# Altium PCB PCB1_Tejas.PcbDoc (part 2 of 2)
Units mm, origin at the board's own origin, x right, y up, seen from the top; angles counter-clockwise.
Board outline 78.61 x 97.49 mm, 2 copper layers (Top Layer, Bottom Layer); 119 components, 67 nets, 500 pads, 65 vias.
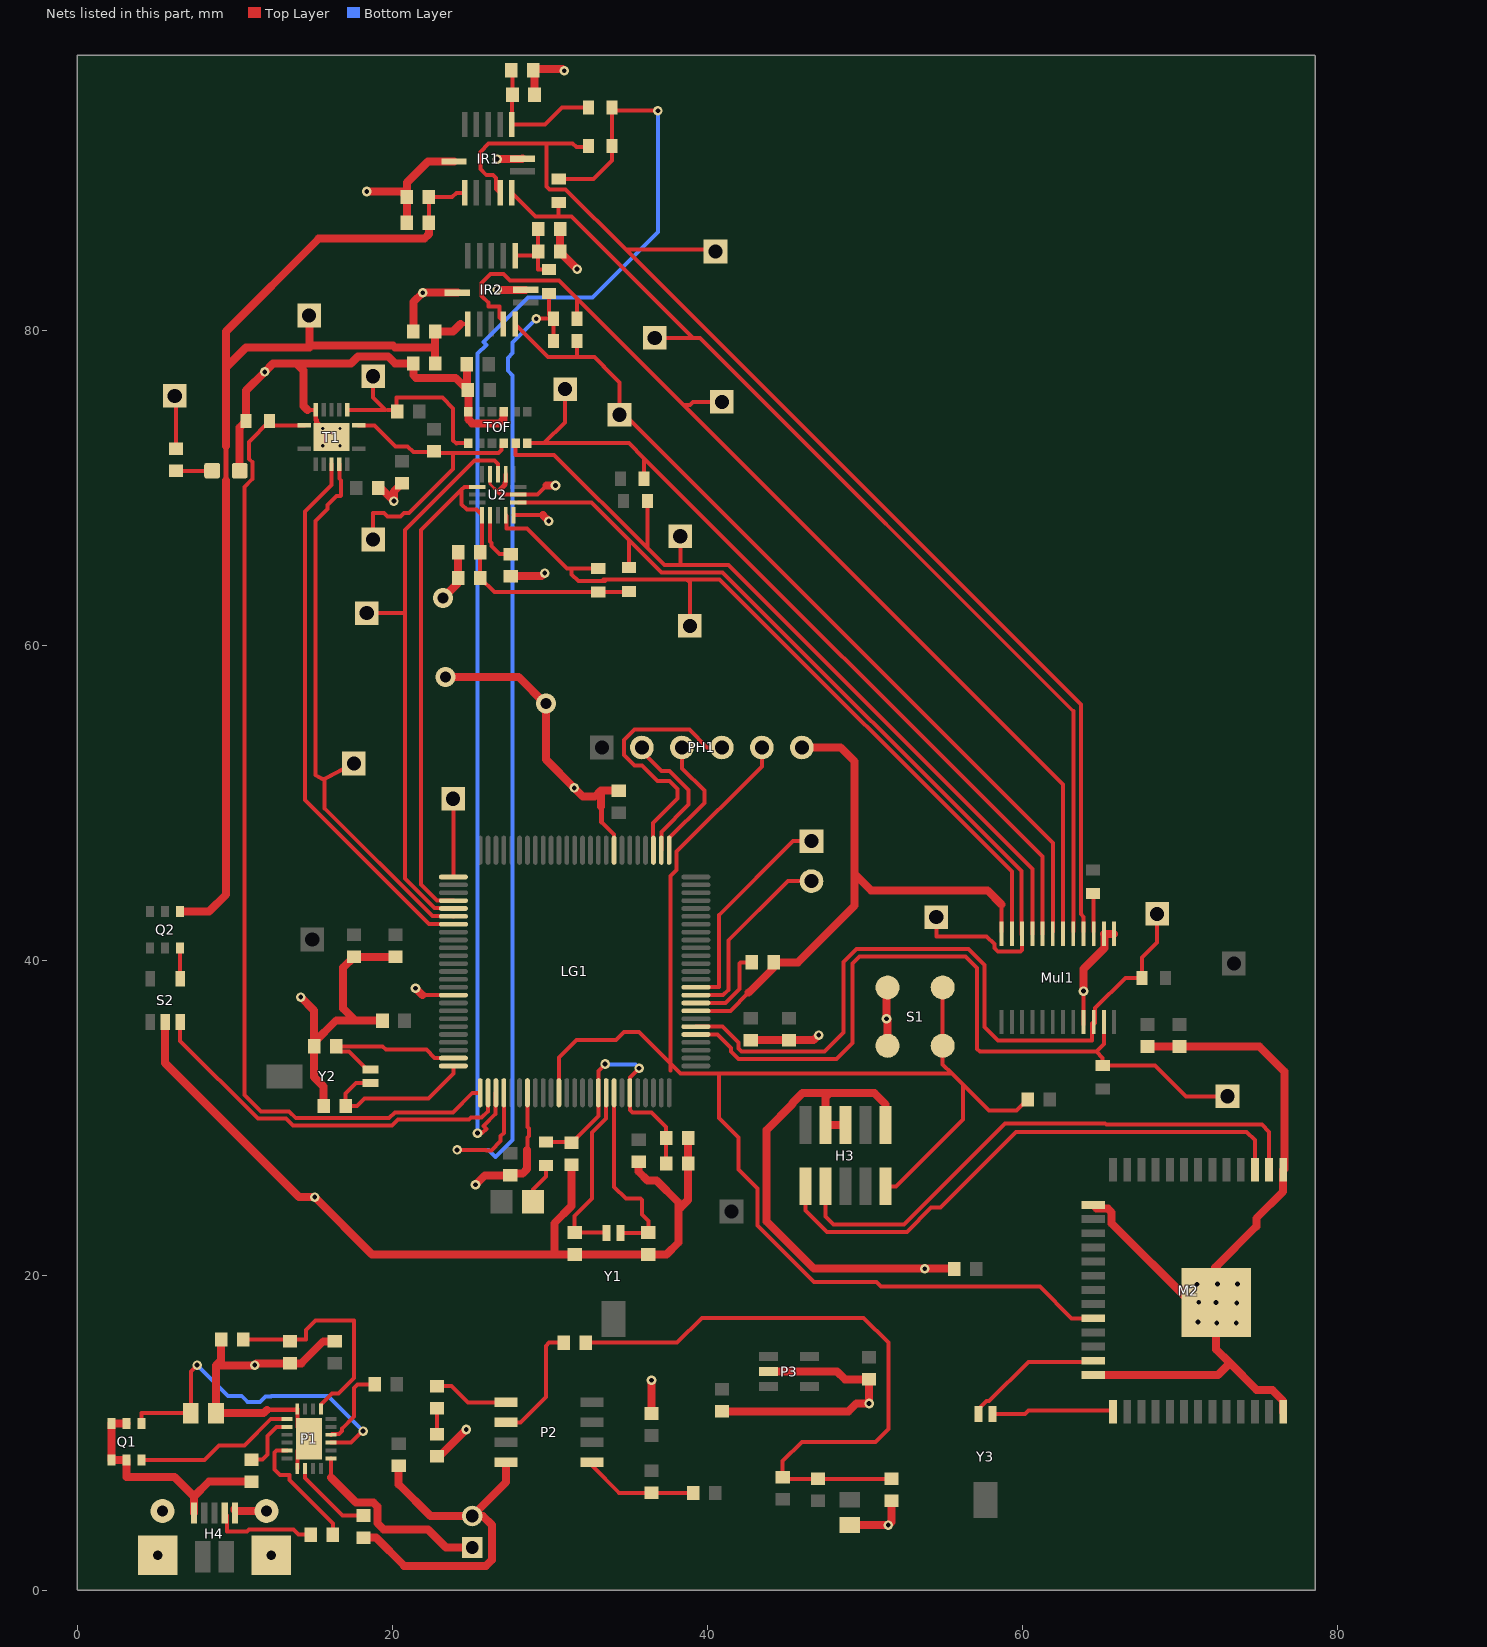
[diagram p2: the nets of this part, all layers, seen from the top]

## Via types
v1: diameter 0.61, hole 0.305, Top Layer to Bottom Layer, 56 vias
v2: diameter 1.27, hole 0.711, Top Layer to Bottom Layer, 5 vias
v3: diameter 0.5, hole 0.2, Top Layer to Bottom Layer, 4 vias

## Nets (pads, with @x,y where several pads share a name; then routed paths per layer and width w, separated by ;. In a path a pad name is that pad's centre, name@x,y a point inside that pad or via, vN(x,y) a via of type N, cw(c..) or ccw(c..) an arc to the next point about the centre after c; other vN are vias at no path point) (continued)
GND: C1.1 C2.1 C3.1 C4.1 C5.1 C6.1 C7.1 C8.1 C9.1 C10.1 C11.1 C12.1 C13.1 C14.1 C15.1 C16.1 C17.1 C18.1 C19.1 C20.1 C21.1 C22.1 C23.1 C24.1 C25.1 C26.1 C27.1 C28.1 C29.1 C30.1 C31.1 C32.2 C33.1 C34.2 C35.1 C36.1 C37.1 C39.1 C40.1 C41.1 C42.1 C43.1 C44.1 D2.2 H2.2 H3.3 H3.5 H3.9 H4.GND1 H4.GND@5.073,2.234 H4.GND@5.373,5.034 H4.GND@11.973,5.034 H4.GND@12.273,2.234 IR1.12 IR1.13 IR2.12 IR2.13 LG1.16 LG1.32 LG1.58 LG1.83 M2.1 M2.14 M2.26 M2.39 M2.40 Mul1.1 Mul1.2 Mul1.12 Mul1.21 P1.7 P1.20 P1.21 P2.4 P3.2 PH1.6 R16.1 R19.1 R20.2 R24.1 S1.1 S2.2 T1.7 T1.15 TOF.9 TOF.12 U2.5 U2.7 U2.10 U2.12 | length 401.4
  Top Layer w0.203: U2.12@26.17,70.871 26.17,70.248 26.67,69.748 26.848,69.571
  Top Layer w0.254: P1.7@13.931,7.727 13.931,8.877 P1.21@14.681,9.627 13.931,10.377 P1.20@13.931,11.527 ; 14.582,74.953 T1.7@15.104,74.953 ; 21.871,37.794 LG1.16@23.847,37.794 ; 26.848,69.571 U2.7@27.97,69.571 29.185,69.571 29.769,70.155 ; U2.5@27.67,68.271 29.519,68.271 ; 28.524,27.965 28.547,27.988 28.547,28.762 28.631,28.846 28.631,29.33 28.547,29.414 LG1.32@28.547,31.594 ; 33.249,48.793 34.047,47.995 LG1.83@34.047,46.994 ; LG1.58@39.247,36.794 41.442,36.794 42.596,37.948 ; Mul1.12@58.655,41.837 58.655,43.555 ; Mul1.21@63.855,35.937 Mul1.21@63.855,36.087 ; Mul1.21@63.855,36.087 v1(63.856,38.049)
  Top Layer w0.305: 12.006,11.461 13.865,11.461 P1.20@13.931,11.527 ; T1.7@15.104,74.953 15.104,74.321 15.159,74.321 15.159,74.173 v3(15.554,73.778) T1.15@16.027,73.304 ; 26.67,69.748 27.121,70.2 27.121,70.33 27.17,70.379 U2.10@27.17,70.871 ; 33.223,49.759 33.249,49.733 33.249,48.793
  Top Layer w0.508: S2.2@5.537,36.09 5.537,33.477 14.046,24.968 v1(15.037,24.968) 18.683,21.322 30.443,21.322 ; R20.2@9.104,15.926 9.104,14.616 8.776,14.287 ; H4.GND1@9.949,5.17 9.949,5.109 10.059,4.999 10.059,4.994 10.098,5.034 H4.GND@11.973,5.034 H4.GND@11.848,4.909 ; D2.2@10.275,71.095 10.275,73.839 R16.1@10.68,74.244 10.68,76.187 v1(11.862,77.368) 12.395,77.902 13.881,77.902 ; 12.006,11.461 11.798,11.252 C33.1@8.776,11.252 8.776,14.287 ; v1(14.148,37.668) 14.997,36.819 C30.1@14.997,34.784 ; 14.582,74.953 14.328,75.207 14.328,77.455 13.881,77.902 ; 15.354,77.888 15.367,77.902 ; C29.1@15.607,30.759 15.607,31.993 14.997,32.602 C30.1@14.997,34.544 C30.1@14.997,34.784 ; T1.15@16.027,73.304 T1.15@16.104,73.228 ; C32.2@16.307,15.813 15.584,15.813 14.184,14.413 C34.2@13.462,14.413 11.34,14.413 v1(11.227,14.3) 11.214,14.287 8.776,14.287 ; R19.1@18.136,3.35 18.926,3.35 20.72,1.556 25.909,1.556 26.289,1.936 26.289,4.14 25.711,4.718 H2.2@25.044,4.718 ; v1(18.339,88.824) 20.534,88.824 C3.1@20.89,88.468 ; C17.1@19.064,70.002 19.228,70.002 v1(20.066,69.164) 20.066,69.785 C16.1@20.574,70.293 ; C19.1@19.202,36.195 17.602,36.195 ; C18.1@20.168,40.219 C42.1@17.526,40.219 16.84,39.534 16.84,36.957 17.602,36.195 ; C35.1@20.371,7.911 20.371,6.731 22.384,4.718 H2.2@25.044,4.718 ; C4.1@20.89,86.843 C3.1@20.89,88.468 ; C8.1@21.296,79.934 21.296,81.799 v1(21.895,82.398) 24.088,82.398 IR2.12@24.091,82.4 ; v1(21.438,38.227) 21.871,37.794 ; C37.1@22.809,8.52 22.973,8.52 v1(24.663,10.211) ; v2(23.19,63.017) 24.141,63.968 C14.1@24.141,64.287 C13.1@24.141,65.913 ; v2(23.343,57.988) 27.991,57.988 29.693,56.286 v2(29.718,56.312) 29.718,52.756 v1(31.521,50.952) 32.08,50.394 32.817,50.394 33.223,50.8 ; IR1.12@23.888,90.732 22.228,90.732 20.89,89.394 C3.1@20.89,88.468 ; C11.1@24.7,77.851 C12.1@24.7,76.276 ; v1(25.248,25.756) 25.843,26.351 C20.1@27.457,26.351 ; v1(26.619,82.601) 26.645,82.575 IR2.13@28.436,82.575 ; v1(26.619,90.881) 28.208,90.881 IR1.13@28.233,90.907 ; TOF.9@27.045,74.838 27.027,74.838 27.027,74.348 26.759,74.081 25.019,74.081 25.019,74.142 24.813,74.348 24.813,74.838 TOF.12@24.795,74.838 24.795,76.181 C12.1@24.751,76.225 C12.1@24.7,76.276 ; P2.4@27.196,8.128 27.196,6.87 H2.2@25.044,4.718 ; C15.1@27.483,64.4 29.45,64.4 v1(29.642,64.592) ; C20.1@27.762,26.453 28.231,26.453 28.524,26.746 28.524,27.965 ; C6.1@28.996,94.971 28.996,96.596 30.785,96.596 v1(30.886,96.495) ; 29.519,68.271 v1(29.896,67.894) ; 29.769,70.155 v1(30.328,70.155) ; C9.1@30.621,86.436 C10.1@30.621,85.014 30.621,84.974 v1(31.699,83.896) ; C23.1@31.344,27.011 31.344,24.398 30.251,23.306 30.251,21.514 30.443,21.322 ; 33.223,49.759 33.223,50.8 ; C44.1@34.341,50.763 34.304,50.8 33.223,50.8 ; C21.1@35.611,27.215 35.611,26.583 36.17,26.025 36.739,26.025 38.125,24.638 38.125,22.073 37.375,21.322 C27.1@36.22,21.322 C28.1@31.547,21.322 30.443,21.322 ; C36.1@36.424,11.23 v1(36.424,13.335) ; 38.252,24.282 38.749,24.779 C25.1@38.749,27.102 C22.1@38.749,28.727 ; C40.1@40.894,11.365 48.932,11.365 49.428,11.862 v1(50.241,11.862) C41.1@50.241,13.397 48.706,13.397 48.209,13.894 P3.2@43.861,13.894 ; 42.596,37.948 44.185,39.537 C26.1@44.185,39.878 45.72,39.878 49.327,43.485 49.327,45.491 ; C24.1@42.723,34.936 C43.1@45.161,34.936 46.722,34.936 v1(47.041,35.255) ; PH1.6@45.974,53.518 48.438,53.518 49.327,52.629 49.327,45.491 ; H3.5@48.742,29.548 H3.3@47.472,29.548 47.472,31.317 47.727,31.572 ; C39.1@49.022,4.153 51.448,4.153 v1(51.46,4.14) 51.664,4.343 R24.1@51.664,5.675 ; H3.9@51.282,29.548 51.282,30.862 50.571,31.572 47.727,31.572 ; S1.1@51.415,34.577 51.415,36.226 v1(51.344,36.297) 51.344,37.862 51.587,38.105 S1.1@51.415,38.278 ; C31.1@55.637,20.396 55.612,20.422 v1(53.772,20.422) 46.736,20.422 43.739,23.419 43.739,29.235 45.374,30.871 45.374,30.937 46.009,31.572 47.727,31.572 ; 58.655,43.555 57.76,44.45 50.368,44.45 49.327,45.491 ; v1(63.856,38.049) 63.856,39.446 65.187,40.778 65.187,41.655 Mul1.2@65.155,41.687 Mul1.1@65.805,41.687 ; M2.26@64.472,13.673 72.398,13.673 73.152,14.427 ; M2.14@64.472,24.473 64.696,24.249 65.398,24.249 65.647,24 65.647,23.298 70.674,18.271 v1(72.278,18.271) 72.278,15.301 73.152,14.427 ; C1.1@67.92,34.53 C2.1@69.952,34.53 75.02,34.53 76.606,32.944 76.606,26.764 M2.1@76.538,26.695 76.538,25.331 74.829,23.623 74.829,23.115 72.216,20.502 M2.40@72.847,19.871 ; M2.40@72.957,18.855 M2.40@73.41,19.308 ; M2.39@76.538,11.328 76.538,12.03 75.842,12.725 74.854,12.725 73.152,14.427 ; 13.881,77.902 15.367,77.902 ; C30.1@14.997,34.784 16.408,36.195 17.602,36.195 ; 15.367,77.902 17.34,77.902 17.785,78.347 19.706,78.347 20.151,77.902 C7.1@21.296,77.902 21.296,77.179 21.481,76.995 23.982,76.995 C12.1@24.7,76.276 ; M2.40@72.847,19.871 72.847,19.761 M2.40@72.957,19.761 ; M2.40@72.847,19.871 M2.40@72.957,19.761 ; M2.40@72.957,19.761 M2.40@73.41,19.308 ; M2.40@72.957,19.761 73.863,19.761 73.635,19.533 v1(73.635,19.456) 73.558,19.456 M2.40@73.41,19.308
  other v1: 72.314,16.967 73.558,16.967 71.12,17.043 73.584,18.237 71.171,18.288 71.069,19.431 72.365,19.456
  other v3: 15.554,72.678 16.654,72.678 16.654,73.778
GPIO_EM4WUO: LG1.1 MTP4.1 | length 5
  Top Layer w0.254: LG1.1@23.847,45.294 23.847,50.085 MTP4.1@24.028,50.267
HFXTAL_N: C27.2 LG1.43 Y1.1 | length 12.1
  Top Layer w0.254: LG1.43@34.047,31.594 34.047,25.618 34.798,24.867 35.738,24.867 35.814,24.791 35.814,23.851 36.22,23.444 C27.2@36.22,22.722 36.181,22.682 Y1.1@34.442,22.682
HFXTAL_P: C28.2 LG1.42 Y1.2 | length 11.7
  Top Layer w0.254: LG1.42@33.547,31.594 33.527,31.574 33.527,29.948 32.638,29.06 32.638,24.867 31.547,23.775 C28.2@31.547,22.722 33.539,22.722 Y1.2@33.579,22.682
ID: P1.5 R34.2 | length 7.9
  Top Layer w0.254: P1.5@13.281,8.877 12.627,8.877 12.497,8.747 12.497,7.671 12.841,7.327 13.431,7.327 13.431,7.016 16.194,4.253 R34.2@16.194,3.531
IR_PWR: C3.2 C4.2 C7.2 C8.2 IR1.1 IR2.1 Q2.4 TP16.1 | length 87.6
  Top Layer w0.254: 9.398,72.669 9.398,77.648 ; 14.681,78.931 TP16.1@14.681,80.95 ; C4.2@22.29,86.843 C3.2@22.29,88.468 23.763,88.468 24.028,88.734 IR1.1@24.56,88.734 ; 22.683,78.931 22.696,78.918 C7.2@22.696,77.902 ; 24.294,80.403 IR2.1@24.764,80.403
  Top Layer w0.305: 9.398,70.458 9.398,72.669
  Top Layer w0.508: Q2.4@6.487,43.098 8.325,43.098 9.398,44.171 9.398,70.458 ; 9.398,72.669 9.398,79.934 15.291,85.827 21.996,85.827 22.29,86.12 C4.2@22.29,86.843 ; 9.398,77.648 10.668,78.918 14.681,78.918 14.681,78.931 ; TP16.1@14.681,80.95 14.695,80.936 14.695,78.931 14.822,79.058 20,79.058 20.127,78.931 22.683,78.931 ; C7.2@22.696,77.902 22.683,77.915 22.683,78.931 ; 24.294,80.403 23.825,79.934 C8.2@22.696,79.934 22.683,79.92 22.683,78.931
IR_PWR_CTRL: LG1.27 S2.3 | length 24.5
  Top Layer w0.254: S2.3@6.487,36.09 6.487,34.889 11.43,29.947 13.222,29.947 13.646,29.522 19.943,29.522 20.317,29.896 24.837,29.896 24.964,30.023 25.643,30.023 26.027,30.407 26.027,31.594 LG1.27@26.047,31.594
LFXTAL_N: C29.2 LG1.25 Y2.1 | length 10.8
  Top Layer w0.254: Y2.1@18.567,32.207 17.653,32.207 17.007,31.561 C29.2@17.007,30.759 17.729,30.759 18.211,31.241 22.275,31.241 23.847,32.813 LG1.25@23.847,33.294
LFXTAL_P: C30.2 LG1.24 Y2.2 | length 10.1
  Top Layer w0.254: C30.2@16.397,34.544 19.355,34.544 19.558,34.341 22.132,34.341 22.66,33.814 23.827,33.814 LG1.24@23.847,33.794 ; C30.2@16.727,34.214 17.221,34.214 18.364,33.071 Y2.2@18.567,33.071
LS_ENABLE: LG1.26 R16.2 T1.8 | length 62.2
  Top Layer w0.254: R16.2@12.18,74.244 10.859,72.923 10.859,71.845 11.074,71.63 11.074,70.559 10.566,70.052 10.566,31.457 11.619,30.404 13.411,30.404 13.836,29.979 19.754,29.979 20.128,30.353 23.825,30.353 25.066,31.594 LG1.26@25.547,31.594 ; R16.2@12.243,74.181 12.243,73.978 T1.8@14.379,73.978
MMA_INT1: LG1.5 TP10.1 U2.11 | length 36.9
  Top Layer w0.254: TP10.1@18.339,62.052 20.777,62.052 ; LG1.5@23.847,43.294 23.827,43.314 22.66,43.314 20.777,45.197 20.777,62.052 ; U2.11@26.67,70.871 26.67,71.524 26.444,71.75 25.192,71.75 20.777,67.335 20.777,62.052
MMA_VDD: C13.2 C14.2 LG1.4 R7.2 R8.2 U2.1 U2.14 | length 46.1
  Top Layer w0.254: LG1.4@23.847,43.794 23.827,43.814 22.811,43.814 21.793,44.831 21.793,67.319 24.363,69.889 ; U2.14@25.37,70.071 24.544,70.071 24.363,69.889 ; R7.2@35.001,63.436 34.95,63.385 R8.2@33.045,63.385 26.444,63.385 C14.2@25.541,64.287 C13.2@25.541,65.913 25.67,66.042 U2.1@25.67,68.271 25.325,68.615 24.708,68.615 24.363,68.961 24.363,69.889
NetC5_2: C5.2 C6.2 IR1.7 R12.1 | length 8.5
  Top Layer w0.254: C6.2@27.533,94.908 C6.2@27.56,94.935 ; C5.2@27.596,96.596 C6.2@27.596,94.971 C6.2@27.56,94.935 ; 32.016,94.158 30.734,94.158 29.655,93.079 IR1.7@27.56,93.079 C6.2@27.56,94.935
NetC9_2: C9.2 C10.2 IR2.7 R13.1 | length 4.5
  Top Layer w0.254: IR2.7@27.764,84.748 29.159,84.748 C10.2@29.221,84.811 ; C9.2@29.221,86.233 C10.2@29.221,85.014 C10.2@29.221,84.811 ; R13.1@29.921,83.856 29.251,83.856 29.221,83.885 C10.2@29.221,84.811
NetC15_2: C15.2 U2.2 | length 3.4
  Top Layer w0.254: U2.2@26.17,68.271 26.17,66.601 26.271,66.5 26.271,66.312 26.783,65.8 C15.2@27.483,65.8
NetC22_2: C22.2 C23.2 C25.2 LG1.41 LG1.45 R26.2 | length 17.8
  Top Layer w0.254: R26.2@29.768,28.411 R26.2@29.718,28.461 31.294,28.461 C23.2@31.344,28.411 33.047,30.115 LG1.41@33.047,31.594 33.047,32.989 v1(33.48,33.422) ; v1(35.636,33.147) 35.636,33.137 35.067,32.568 35.067,31.614 LG1.45@35.047,31.594 35.047,30.511 35.219,30.339 36.438,30.339 37.349,29.427 C22.2@37.349,28.727 C25.2@37.349,27.102
  Bottom Layer w0.254: v1(33.48,33.422) 33.527,33.376 35.408,33.376 v1(35.636,33.147)
NetC26_2: C26.2 LG1.59 | length 5.6
  Top Layer w0.254: LG1.59@39.247,37.294 41.115,37.294 42.012,38.19 42.012,39.802 42.088,39.878 C26.2@42.785,39.878
NetC33_2: C33.2 P1.13 Q1.4 | length 21.9
  Top Layer w0.254: Q1.4@4.049,10.586 4.049,11.252 C33.2@7.176,11.252 7.176,13.907 v1(7.569,14.3) ; P1.13@16.081,9.377 17.339,9.377 18.071,10.109 v1(18.11,10.109)
  Bottom Layer w0.254: v1(7.569,14.3) 9.525,12.344 10.406,12.344 10.787,11.963 11.565,11.963 11.921,12.319 12.256,12.319 12.282,12.344 15.875,12.344 v1(18.11,10.109)
NetC34_1: C34.1 P1.17 R20.1 | length 14.6
  Top Layer w0.254: R20.1@10.504,15.926 14.478,15.926 14.478,16.535 15.088,17.145 17.526,17.145 17.526,13.487 16.548,12.51 16.142,12.51 15.431,11.799 P1.17@15.431,11.527
NetC37_2: C37.2 R21.1 | length 1.6
  Top Layer w0.254: C37.2@22.809,9.92 R21.1@22.809,11.568
NetC38_1: C38.1 R22.1 R23.1 R24.2 | length 41.3
  Top Layer w0.254: R22.1@32.247,15.723 38.049,15.723 39.624,17.297 49.886,17.297 51.46,15.723 51.46,10.236 50.648,9.423 45.974,9.423 44.755,8.204 R23.1@44.755,7.188 ; R23.1@44.958,7.075 C38.1@46.99,7.075 R24.2@51.664,7.075
NetD1_1: D1.1 L2.2 P2.5 | length 7.4
  Top Layer w0.254: P2.5@32.646,8.128 32.646,7.918 34.369,6.195 L2.2@36.424,6.195 39.043,6.195 D1.1@39.065,6.172
NetD2_1: D2.1 R25.2 | length 2.3
  Top Layer w0.254: R25.2@6.223,71.08 8.507,71.08 D2.1@8.521,71.095
NetH4_ID: H4.ID R34.1 | length 6.7
  Top Layer w0.254: H4.ID@9.323,4.909 9.475,4.757 9.475,3.734 10.734,3.734 10.865,3.865 13.681,3.865 14.015,3.531 R34.1@14.794,3.531
NetJ1_1: J1.1 R25.1 | length 3.4
  Top Layer w0.254: J1.1@6.147,75.844 6.223,75.768 R25.1@6.223,72.48
NetL1_1: L1.1 P1.14 | length 5.3
  Top Layer w0.254: P1.14@16.081,9.877 16.126,9.921 16.568,9.921 16.761,10.115 16.761,10.259 17.526,11.024 17.526,12.841 17.766,13.081 L1.1@18.858,13.081
NetL3_1: L3.1 R26.1 | length 2.6
  Top Layer w0.254: L3.1@28.889,24.663 28.889,25.46 29.718,26.289 R26.1@29.718,26.961
NetM2_25: M2.25 Y3.2 | length 8
  Top Layer w0.254: Y3.2@57.201,11.201 57.201,11.522 57.687,12.008 57.854,12.008 60.35,14.504 63.677,14.504
NetM2_27: M2.27 Y3.1 | length 7.8
  Top Layer w0.254: Y3.1@58.064,11.201 60.148,11.201 60.35,11.404 65.662,11.404 M2.27@65.738,11.328
NetMul1_3: Mul1.3 R11.2 | length 2.5
  Top Layer w0.254: Mul1.3@64.505,41.837 64.505,44.07 R11.2@64.668,44.233
NetP1_1: P1.1 Q1.3 | length 10.3
  Top Layer w0.254: Q1.3@4.049,8.261 8.032,8.261 8.966,9.195 10.566,9.195 12.248,10.877 P1.1@13.281,10.877
NetP1_2: P1.2 R18.2 | length 3.8
  Top Layer w0.254: R18.2@11.024,8.295 11.724,8.295 12.04,8.611 12.04,9.804 12.612,10.377 P1.2@13.281,10.377
NetP1_8: P1.8 R19.2 | length 5.3
  Top Layer w0.254: P1.8@14.431,7.727 14.431,7.122 16.804,4.75 R19.2@18.136,4.75
NetP2_1: P2.1 R21.2 | length 4.8
  Top Layer w0.254: R21.2@22.809,12.968 23.735,12.968 24.765,11.938 P2.1@27.196,11.938
NetP2_2: P2.2 R22.2 | length 7.6
  Top Layer w0.254: P2.2@27.196,10.668 28.118,10.668 29.718,12.268 29.718,15.519 29.921,15.723 R22.2@30.847,15.723
NetQ2_3: Q2.3 S2.4 | length 1.9
  Top Layer w0.254: S2.4@6.487,38.84 Q2.3@6.487,40.773
RESET_radio: H3.10 LG1.36 M2.22 PH1.5 R17.1 S1.2 | length 106.9
  Top Layer w0.254: LG1.36@30.547,31.594 30.547,33.823 31.674,34.95 34.184,34.95 34.692,35.458 35.628,35.458 37.643,33.444 ; 37.643,33.011 37.643,33.444 ; PH1.5@43.434,53.518 43.434,52.324 38.027,46.917 38.027,45.739 37.643,45.354 37.643,33.444 ; H3.10@51.283,25.654 51.943,25.654 56.197,29.909 56.197,32.118 ; S1.2@54.915,38.278 S1.2@54.915,34.577 54.915,33.401 55.502,32.814 ; R17.1@60.311,31.166 59.6,30.455 57.861,30.455 56.197,32.118 ; M2.22@64.472,17.273 63.092,17.273 61.087,19.279 51.003,19.279 50.698,19.583 46.748,19.583 43.155,23.177 43.155,25.527 41.961,26.721 41.961,28.757 40.716,30.001 40.716,32.814 ; 37.643,33.444 38.273,32.814 40.716,32.814 ; 40.716,32.814 55.502,32.814 ; 55.502,32.814 56.197,32.118
SCL: LG1.56 MTP3.1 Mul1.22 R9.2 | length 46.5
  Top Layer w0.254: LG1.56@39.247,35.794 40.94,35.794 41.943,34.791 41.943,34.399 42.136,34.206 47.414,34.206 48.616,35.408 48.616,39.903 49.428,40.716 56.54,40.716 57.556,39.7 57.556,35.776 58.425,34.907 64.41,34.907 64.41,35.988 Mul1.22@64.465,36.043 ; Mul1.22@64.505,35.937 64.6,36.032 64.6,36.968 66.52,38.887 R9.2@67.576,38.887 67.576,40.169 68.529,41.123 MTP3.1@68.529,42.951
SCL0: IR1.5 Mul1.5 R2.1 TP2.1 | length 66.6
  Top Layer w0.254: IR1.5@27.56,88.734 29.045,87.249 30.531,87.249 ; R2.1@30.531,88.125 30.531,87.249 ; TP2.1@36.627,79.527 39.065,79.527 ; Mul1.5@63.205,41.837 63.205,55.819 39.497,79.527 39.065,79.527 ; 30.531,87.249 31.344,87.249 39.065,79.527
SCL1: IR2.5 Mul1.7 R4.1 TP4.1 | length 55.7
  Top Layer w0.254: IR2.5@27.764,80.403 29.858,78.308 31.75,78.308 ; R4.1@31.687,79.324 31.687,78.371 31.75,78.308 ; Mul1.7@61.905,41.837 61.905,47.442 34.696,74.651 TP4.1@34.392,74.651 34.392,76.683 33.376,77.699 33.401,77.699 32.791,78.308 31.75,78.308
SCL2: Mul1.9 R6.1 TOF.5 TP6.1 | length 53.2
  Top Layer w0.254: TOF.5@27.795,72.838 27.795,72.103 30.233,72.103 36.158,66.179 ; R6.1@36.158,68.961 36.158,66.179 ; TP6.1@38.252,66.929 38.252,65.1 ; Mul1.9@60.605,41.687 60.605,45.796 41.3,65.1 38.252,65.1 ; 36.158,66.179 37.236,65.1 38.252,65.1
SCL3: Mul1.11 R8.1 TP8.1 U2.4 | length 51.1
  Top Layer w0.254: U2.4@27.17,68.271 27.215,68.226 27.215,67.415 28.52,67.415 31.051,64.885 31.267,64.885 ; R8.1@33.045,64.885 31.267,64.885 ; TP8.1@38.862,61.239 38.862,63.983 38.659,64.186 ; Mul1.11@59.305,41.837 59.305,45.636 40.755,64.186 38.659,64.186 ; 31.267,64.885 31.356,64.796 31.356,64.503 31.775,64.084 33.477,64.084 33.376,64.186 38.659,64.186
SCL_OUT: H5.1 LG1.61 | length 13.9
  Top Layer w0.254: LG1.61@39.247,38.294 40.707,38.294 40.707,42.866 45.415,47.574 H5.1@46.584,47.574
SDA: LG1.55 MTP2.1 Mul1.23 R10.2 | length 49.2
  Top Layer w0.254: LG1.55@39.247,35.294 40.627,35.294 41.485,34.435 41.485,34.21 41.947,33.749 48.176,33.749 49.173,34.746 49.173,39.814 49.618,40.259 56.351,40.259 57.099,39.511 57.099,34.384 57.27,34.214 64.668,34.214 ; Mul1.23@65.155,36.087 65.155,34.7 64.668,34.214 ; MTP2.1@73,31.369 70.358,31.369 68.389,33.338 R10.2@65.075,33.338 65.075,33.807 64.668,34.214
SDA0: IR1.4 Mul1.4 R1.1 TP1.1 | length 81.1
  Top Layer w0.254: IR1.4@26.81,88.734 26.566,88.979 26.566,89.673 26.372,89.867 25.932,89.867 25.552,90.246 25.552,91.338 26.086,91.872 29.743,91.872 ; R1.1@32.422,91.719 32.346,91.643 31.648,91.643 31.42,91.872 29.743,91.872 ; TP1.1@40.488,85.014 40.377,85.124 34.798,85.124 ; Mul1.4@63.855,41.837 63.855,42.764 63.685,42.934 63.685,56.237 34.798,85.124 ; 29.743,91.872 29.751,91.865 29.751,89.138 29.944,88.944 30.978,88.944 34.798,85.124
SDA1: IR2.4 Mul1.6 R3.1 TP3.1 | length 67.3
  Top Layer w0.254: IR2.4@27.014,80.403 27.014,80.581 26.769,80.826 26.769,81.536 26.059,81.536 26.059,81.76 25.629,82.19 25.629,83.011 26.209,83.591 27.03,83.591 27.446,83.175 30.54,83.175 31.687,82.029 ; R3.1@31.687,80.747 31.687,82.029 ; TP3.1@40.894,75.463 39.065,75.463 38.862,75.26 38.456,75.26 ; Mul1.6@62.555,41.837 62.555,51.161 38.456,75.26 ; 31.687,82.029 38.456,75.26
SDA2: Mul1.8 R5.1 TOF.6 TP5.1 | length 54
  Top Layer w0.254: TOF.6@28.545,72.838 29.607,72.838 ; TP5.1@30.937,76.276 30.937,74.168 29.607,72.838 ; R5.1@35.954,70.383 R5.1@35.954,70.587 35.954,71.869 ; Mul1.8@61.255,41.687 61.255,42.631 61.239,42.631 61.239,46.584 35.954,71.869 ; 29.607,72.838 34.985,72.838 35.954,71.869
SDA3: Mul1.10 R7.1 TP7.1 U2.6 | length 55.7
  Top Layer w0.254: U2.6@27.97,69.071 32.619,69.071 35.001,66.689 ; R7.1@35.001,64.936 35.001,66.689 ; TP7.1@54.508,42.748 54.508,41.529 57.703,41.529 58.2,41.032 58.2,40.776 58.412,40.564 59.86,40.564 59.955,40.659 Mul1.10@59.955,41.687 ; Mul1.10@59.921,41.631 59.921,45.667 40.945,64.643 37.047,64.643 35.001,66.689
SDA_OUT: H5.2 LG1.60 | length 12.2
  Top Layer w0.254: LG1.60@39.247,37.794 40.969,37.794 41.299,38.124 41.299,41.248 45.085,45.034 H5.2@46.584,45.034
SWCLK: LG1.76 PH1.3 | length 8
  Top Layer w0.254: LG1.76@37.547,46.994 37.547,47.758 39.776,49.987 39.776,50.775 38.354,52.197 PH1.3@38.354,53.518
SWCLK_radio: H3.4 M2.2 | length 35.6
  Top Layer w0.254: H3.4@47.473,25.654 47.473,23.724 47.981,23.216 52.447,23.216 58.873,29.642 65.227,29.642 65.303,29.566 75.184,29.566 75.638,29.112 M2.2@75.638,26.695
SWDIO: LG1.77 PH1.2 | length 8.8
  Top Layer w0.254: PH1.2@35.814,53.518 35.814,53.264 37.047,52.031 37.58,52.031 38.786,50.825 38.786,49.886 37.047,48.147 LG1.77@37.047,46.994
SWDIO_radio: H3.2 M2.3 | length 35.4
  Top Layer w0.254: H3.2@46.203,25.654 46.203,24.13 47.574,22.758 52.636,22.758 54.186,24.308 54.762,24.308 59.563,29.108 74.219,29.108 74.738,28.589 M2.3@74.738,26.695
SWO: LG1.78 PH1.4 | length 16.7
  Top Layer w0.254: LG1.78@36.547,46.994 36.527,47.014 36.527,48.719 38.075,50.267 38.075,50.89 37.563,51.401 36.813,51.401 35.827,52.387 35.346,52.387 34.683,53.049 34.683,53.986 35.346,54.649 38.822,54.649 39.953,53.518 PH1.4@40.894,53.518
TOF_INT0: R14.1 T1.2 TOF.4 TP13.1 | length 19.5
  Top Layer w0.254: T1.2@17.829,73.978 18.829,73.978 20.164,72.644 20.94,72.644 21.309,72.275 22.606,72.275 22.673,72.208 23.825,72.208 ; TP13.1@18.745,66.726 18.745,68.402 19.427,68.402 19.656,68.174 20.476,68.174 20.705,68.402 21.031,68.402 23.825,71.196 23.825,72.208 ; TOF.4@27.045,72.838 26.9,72.693 26.9,72.401 26.707,72.208 23.825,72.208
TOF_INT0_LS: LG1.6 T1.13 TP11.1 | length 36.2
  Top Layer w0.254: 15.608,51.486 15.088,51.765 15.088,67.895 15.85,68.656 15.85,68.914 16.43,69.494 16.688,69.494 16.713,69.52 16.713,70.481 16.604,70.591 T1.13@16.604,71.503 ; TP11.1@17.526,52.502 15.676,51.522 15.676,49.651 22.514,42.814 23.827,42.814 LG1.6@23.847,42.794
TOF_INT1: R15.1 T1.3 TOF.1 TP12.1 | length 13.3
  Top Layer w0.254: T1.3@17.104,74.953 19.541,74.953 18.745,75.749 TP12.1@18.745,77.089 ; 19.685,74.953 20.131,74.953 20.23,74.854 20.23,75.729 23.153,75.729 23.825,75.057 23.825,73.025 24.028,72.822 24.044,72.838 TOF.1@24.795,72.838
TOF_INT1_LS: LG1.7 T1.12 | length 34.7
  Top Layer w0.254: T1.12@16.104,71.503 16.104,70.18 14.429,68.505 14.429,50.178 22.293,42.314 23.827,42.314 LG1.7@23.847,42.294
V_BAT: H2.1 P1.11 | length 12.6
  Top Layer w0.254: 16.081,7.16 P1.11@16.081,8.377
  Top Layer w0.508: 16.081,7.16 17.666,5.575 18.762,5.575 19.011,5.326 19.011,4.271 19.421,3.861 22.225,3.861 23.368,2.718 H2.1@25.044,2.718
VBUS: H4.VBUS1 Q1.1 Q1.2 Q1.5 Q1.6 R18.1 | length 15.2
  Top Layer w0.508: Q1.5@3.099,10.586 Q1.6@2.149,10.586 Q1.1@2.149,8.261 Q1.2@3.099,8.261 3.099,7.188 6.136,7.188 7.373,5.951 ; H4.VBUS1@7.373,4.909 7.373,5.951 ; R18.1@11.024,6.895 8.317,6.895 7.373,5.951
VCNL_VDD1: LG1.28 R1.2 R2.2 R12.2 | length 85.8
  Top Layer w0.254: v1(25.375,29.032) 25.667,29.032 25.933,29.298 25.749,29.483 26.527,30.261 26.527,31.574 LG1.28@26.547,31.594 ; R2.2@30.531,89.625 32.754,89.625 33.922,90.793 R1.2@33.922,91.719 R12.2@33.922,94.158 34.126,93.955 v1(36.83,93.955)
  Bottom Layer w0.254: v1(25.375,29.032) 25.375,78.524 25.933,79.083 25.749,79.267 28.575,82.093 32.664,82.093 36.83,86.258 v1(36.83,93.955)
VCNL_VDD2: LG1.29 R3.2 R4.2 R13.2 | length 67.6
  Top Layer w0.254: v1(24.079,27.965) 25.908,27.965 25.933,27.94 26.268,27.94 26.848,28.52 26.848,28.854 27.047,29.053 LG1.29@27.047,31.594 ; v1(29.108,80.747) R3.2@30.187,80.747 ; R13.2@29.921,82.356 29.921,81.013 R3.2@30.187,80.747 ; R4.2@30.187,79.324 R3.2@30.187,80.747
  Bottom Layer w0.254: v1(24.079,27.965) 26.064,27.965 26.522,27.508 27.61,28.596 27.61,77.136 27.305,77.441 27.305,78.261 27.61,78.566 27.61,79.248 v1(29.108,80.747)
pads on no net: H3.6 H3.7 H3.8 H4.D+ H4.D- H4.GND@7.923,2.134 H4.GND@9.423,2.134 IR1.2 IR1.3 IR1.6 IR1.8 IR1.9 IR1.10 IR1.11 IR2.2 IR2.3 IR2.6 IR2.8 IR2.9 IR2.10 IR2.11 LG1.2 LG1.3 LG1.9 LG1.10 LG1.11 LG1.12 LG1.13 LG1.14 LG1.15 LG1.18 LG1.19 LG1.20 LG1.21 LG1.22 LG1.23 LG1.30 LG1.33 LG1.34 LG1.35 LG1.37 LG1.38 LG1.39 LG1.40 LG1.46 LG1.47 LG1.48 LG1.49 LG1.51 LG1.52 LG1.53 LG1.54 LG1.62 LG1.63 LG1.64 LG1.65 LG1.66 LG1.67 LG1.68 LG1.69 LG1.70 LG1.71 LG1.72 LG1.73 LG1.74 LG1.75 LG1.79 LG1.80 LG1.81 LG1.84 LG1.85 LG1.86 LG1.87 LG1.88 LG1.89 LG1.90 LG1.91 LG1.92 LG1.93 LG1.94 LG1.95 LG1.96 LG1.97 LG1.98 LG1.99 LG1.100 M2.6 M2.7 M2.8 M2.9 M2.10 M2.11 M2.12 M2.13 M2.15 M2.16 M2.17 M2.18 M2.19 M2.20 M2.21 M2.23 M2.24 M2.28 M2.29 M2.30 M2.32 M2.33 M2.34 M2.35 M2.36 M2.37 M2.38 Mul1.13 Mul1.14 Mul1.15 Mul1.16 Mul1.17 Mul1.18 Mul1.19 Mul1.20 P1.3 P1.4 P1.6 P1.9 P1.10 P1.15 P1.16 P1.19 P2.7 P2.8 P3.4 S2.1 T1.4 T1.5 T1.6 T1.9 T1.10 T1.11 TOF.2 TOF.3 TOF.7 TOF.11 U2.3 U2.8 U2.9 U2.13 U2.15 U2.16 Y1.3 Y2.3 Y3.3

## Polygon pours and split planes (outlines as drawn)
GND on Bottom Layer "ground" (solid, remove dead copper, pour order 6): 0.914,88.341 9.652,97.079 38.176,97.079 76.352,58.903 76.352,9.169 67.894,0.711 5.639,0.711 0.762,5.588 1.422,6.248 1.422,88.671

## Other copper
Top Layer:
  text "Robonauts_PCB" at 170.078,-55.753 h2
  text "1:1" at 205.562,-75.946 h1.52

## Silkscreen, mask and mechanical layers (free items; w line width, h text height)
Top Overlay:
  lines w0.254: 21.742,62.738 21.742,94.64 30.505,94.64 30.505,62.738 21.742,62.738
  text "ROBONAUTS" at 53.823,91.338 h1.83
Outline:
  lines w0.254: -0.102,97.485 0,97.384 0,0 78.562,0 78.562,97.434 78.511,97.485 -0.102,97.485
Mechanical 16:
  drawing of 1874 lines, arcs and shapes, not listed
  text "1" at -31.547,106.477 h1.78
  text "2" at 41.097,106.477 h1.78
  text "3" at 114.249,106.477 h1.78
  text "4" at 187.147,106.477 h1.78
  text "A" at -65.888,83.464 h1.78
  text "A" at 221.132,83.464 h1.78
  text "B" at -65.888,35.408 h1.78
  text "B" at 221.132,35.408 h1.78
  text "C" at -65.888,-13.106 h1.78
  text "C" at 221.132,-13.106 h1.78
  text "ENGINEER:" at 106.197,-50.114 h1.14
  text "TITLE:" at 144.297,-50.114 h1.14
  text "PCB DESIGNER:" at 106.197,-57.607 h1.14
  text "D" at -65.888,-61.112 h1.78
  text "D" at 221.132,-61.112 h1.78
  text "DATE:" at 106.197,-65.354 h1.14
  text "PART NO.:" at 144.297,-65.354 h1.14
  text "REV:" at 197.637,-65.354 h1.14
  text "Altium Limited" at 73.177,-67.894 h1.78
  text ".PRINT_DATE" at 107.467,-68.402 h1.78
  text "12a Rodborough Rd" at 73.177,-70.434 h1.78
  text "Frenchs Forest" at 73.177,-72.974 h1.78
  text "FILE NAME:" at 106.197,-72.974 h1.14
  text "DWG NO:" at 144.297,-72.974 h1.14
  text "SCALE:" at 197.637,-72.974 h1.14
  text "NSW 2086" at 73.177,-75.514 h1.78
  text ".PCB_FILE_NAME_NO_PATH" at 107.467,-76.022 h1.78
  text "1" at -31.547,-81.483 h1.78
  text "2" at 41.097,-81.483 h1.78
  text "3" at 114.249,-81.483 h1.78
  text "4" at 187.147,-81.483 h1.78
Drill Drawing:
  circle w0.254: c-37.368,-21.683 r0.847
  lines w0.254: -38.214,-37.77 -37.368,-37.346 -36.521,-37.77 -36.944,-36.923 -36.521,-36.076 -37.368,-36.5 -38.214,-36.076 -37.791,-36.923 -38.214,-37.77 ; -38.214,-33.96 -36.521,-33.96 -36.521,-32.266 -38.214,-32.266 -38.214,-33.96 ; -38.214,-30.15 -38.214,-29.726 -37.791,-29.303 -38.214,-28.88 -38.214,-28.456 -37.791,-28.456 -37.368,-28.88 -36.944,-28.456 -36.521,-28.456 -36.521,-28.88 -36.944,-29.303 -36.521,-29.726 -36.521,-30.15 -36.944,-30.15 -37.368,-29.726 -37.791,-30.15 -38.214,-30.15 ; -38.214,-25.916 -37.791,-25.916 -37.791,-26.34 -36.944,-26.34 -36.944,-25.916 -36.521,-25.916 -36.521,-25.07 -36.944,-25.07 -36.944,-24.646 -37.791,-24.646 -37.791,-25.07 -38.214,-25.07 -38.214,-25.916 ; -38.214,-17.026 -36.521,-17.026 -37.368,-18.72 -38.214,-17.026 ; -38.214,-14.486 -37.791,-14.486 -37.368,-14.91 -36.944,-14.486 -36.521,-14.486 -36.944,-14.063 -36.521,-13.64 -36.944,-13.64 -37.368,-13.216 -37.791,-13.64 -38.214,-13.64 -37.791,-14.063 -38.214,-14.486
  lines w0.381: -39.733,-38.913 142.539,-38.913 ; -39.733,-12.243 142.539,-12.243 ; -25.741,-42.723 -25.741,-8.433 ; -12.028,-42.723 -12.028,-8.433 ; 15.904,-42.723 15.904,-8.433 ; 28.753,-42.723 28.753,-8.433 ; 47.391,-42.723 47.391,-8.433 ; 85.48,-42.723 85.48,-8.433 ; 100.462,-42.723 100.462,-8.433 ; 119.405,-42.723 119.405,-8.433 ; -39.733,-42.723 142.539,-42.723 142.539,-8.433 -39.733,-8.433 -39.733,-42.723
  text "Symbol" at -37.447,-11.1 h1.83
  text "Count" at -24.598,-11.1 h1.83
  text "Hole Size" at -10.885,-11.1 h1.83
  text "Plated" at 17.047,-11.1 h1.83
  text "Hole Type" at 29.896,-11.1 h1.83
  text "Drill Layer Pair" at 48.534,-11.1 h1.83
  text "Via/Pad" at 86.623,-11.1 h1.83
  text "Pad Shape" at 101.605,-11.1 h1.83
  text "Hole Length" at 120.548,-11.1 h1.83
  text "2" at -24.598,-14.91 h1.52
  text "23.62mil (0.600mm)" at -10.885,-14.91 h1.52
  text "PTH" at 17.047,-14.91 h1.52
  text "Round" at 29.896,-14.91 h1.52
  text "Top Layer - Bottom Layer" at 48.534,-14.91 h1.52
  text "Pad" at 86.623,-14.91 h1.52
  text "Rectangle" at 101.605,-14.91 h1.52
  text "-" at 120.548,-14.91 h1.52
  text "2" at -24.598,-18.72 h1.52
  text "27.56mil (0.700mm)" at -10.885,-18.72 h1.52
  text "PTH" at 17.047,-18.72 h1.52
  text "Round" at 29.896,-18.72 h1.52
  text "Top Layer - Bottom Layer" at 48.534,-18.72 h1.52
  text "Pad" at 86.623,-18.72 h1.52
  text "Rounded" at 101.605,-18.72 h1.52
  text "-" at 120.548,-18.72 h1.52
  text "2" at -24.598,-22.53 h1.52
  text "31.50mil (0.800mm)" at -10.885,-22.53 h1.52
  text "PTH" at 17.047,-22.53 h1.52
  text "Round" at 29.896,-22.53 h1.52
  text "Top Layer - Bottom Layer" at 48.534,-22.53 h1.52
  text "Pad" at 86.623,-22.53 h1.52
  text "(Mixed)" at 101.605,-22.53 h1.52
  text "-" at 120.548,-22.53 h1.52
  text "4" at -24.598,-26.34 h1.52
  text "7.87mil (0.200mm)" at -10.885,-26.34 h1.52
  text "PTH" at 17.047,-26.34 h1.52
  text "Round" at 29.896,-26.34 h1.52
  text "Top Layer - Bottom Layer" at 48.534,-26.34 h1.52
  text "Via" at 86.623,-26.34 h1.52
  text "Rounded" at 101.605,-26.34 h1.52
  text "-" at 120.548,-26.34 h1.52
  text "5" at -24.598,-30.15 h1.52
  text "28.00mil (0.711mm)" at -10.885,-30.15 h1.52
  text "PTH" at 17.047,-30.15 h1.52
  text "Round" at 29.896,-30.15 h1.52
  text "Top Layer - Bottom Layer" at 48.534,-30.15 h1.52
  text "Via" at 86.623,-30.15 h1.52
  text "Rounded" at 101.605,-30.15 h1.52
  text "-" at 120.548,-30.15 h1.52
  text "28" at -24.598,-33.96 h1.52
  text "35.43mil (0.900mm)" at -10.885,-33.96 h1.52
  text "PTH" at 17.047,-33.96 h1.52
  text "Round" at 29.896,-33.96 h1.52
  text "Top Layer - Bottom Layer" at 48.534,-33.96 h1.52
  text "Pad" at 86.623,-33.96 h1.52
  text "(Mixed)" at 101.605,-33.96 h1.52
  text "-" at 120.548,-33.96 h1.52
  text "56" at -24.598,-37.77 h1.52
  text "12.00mil (0.305mm)" at -10.885,-37.77 h1.52
  text "PTH" at 17.047,-37.77 h1.52
  text "Round" at 29.896,-37.77 h1.52
  text "Top Layer - Bottom Layer" at 48.534,-37.77 h1.52
  text "Via" at 86.623,-37.77 h1.52
  text "Rounded" at 101.605,-37.77 h1.52
  text "-" at 120.548,-37.77 h1.52
  text "99 Total" at -24.598,-41.58 h1.52

## Dimensions
0,-2.5 to 78.511,-2.083 on Drill Drawing
-2.5,0 to -2.286,97.434 on Drill Drawing

## Text inside footprints (layer, text, board x,y; h text height)
H4: Mechanical 16 "PCB EDGE" at 8.673,0.134 h0.63